# EAGLE board Alfa_t (EAGLE 9.6.2)
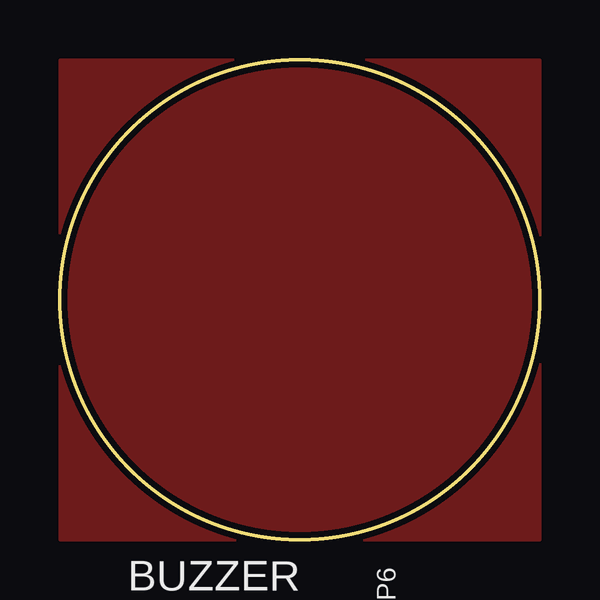
[diagram p0: board, top side]
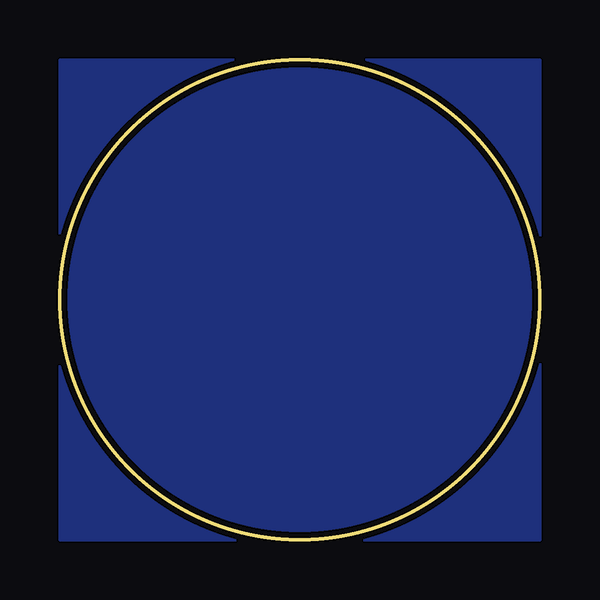
[diagram p1: board, bottom side, seen from below]

Size 20 x 20 mm. Coordinates in mm from the lower left corner, seen from the top.
Outline: circle at 10,10 radius 10
Copper layers (1*16): Top 0.035mm / dielectric 1.5mm / Bottom 0.035mm
Design rules "rezonit": minimum track width 0.25mm, minimum drill 0.35mm, track to track 0.2mm, track to pad 0.2mm, pad to pad 0.15mm, via to via 0.2mm, smd to smd 0.2mm, copper to edge 0.25mm, drill to drill 0.25mm, minimum pad ring 10mil, minimum via ring 8mil, stop-mask expansion 4mil, vias tented up to drill 0mil, thermal gap 10mil

## Footprints (pad centres in the part's own frame; a part is rotated, then mirrored left to right if it is on the bottom)
SOT23-3 = smd 0.56 x 0.73: 1 -0.95,-1; 2 0.95,-1; 3 0,1
BUZZER = drill 0.9 octagon: + 0,-4; - 0,4
C1206 = smd 1.6 x 1.8: 1 -1.4,0; 2 1.4,0
C0603 = smd 1.1 x 1: 1 -0.85,0; 2 0.85,0
SMD1,27-2,54 = smd 1.27 x 2.54: 1 0,0
1X01 = drill 1.016 octagon: 1 0,0
SOP8 = smd 0.6 x 1.6: 1 -1.905,-2.6; 2 -0.635,-2.6; 3 0.635,-2.6; 4 1.905,-2.6; 5 1.905,2.6; 6 0.635,2.6; 7 -0.635,2.6; 8 -1.905,2.6
CHIPLED_0603 = smd 0.8 x 0.8: A 0,-0.75; C 0,0.75
SJ_2W = smd 1.27 x 2.54: 1 -2.54,0; 2 0,0; 3 2.54,0
R0603 = smd 1 x 1.1: 1 -0.85,0; 2 0.85,0
SJ = smd 1.168 x 1.6: 1 -0.762,0; 2 0.762,0
TSSOP-20 = smd 0.4 x 1.35: 1 -2.925,-2.875; 2 -2.275,-2.875; 3 -1.625,-2.875; 4 -0.975,-2.875; 5 -0.325,-2.875; 6 0.325,-2.875; 7 0.975,-2.875; 8 1.625,-2.875; 9 2.275,-2.875; 10 2.925,-2.875; 11 2.925,2.875; 12 2.275,2.875; 13 1.625,2.875; 14 0.975,2.875; 15 0.325,2.875; 16 -0.325,2.875; 17 -0.975,2.875; 18 -1.625,2.875; 19 -2.275,2.875; 20 -2.925,2.875

## Placement (x,y rotation side)
BUZ  SI2302CDS  [SOT23-3]  4,-35 0 top  (outside the outline)
BUZZER  BUZZER-5V  [BUZZER]  6,-9 0 top  (outside the outline)
C3  10µF  [C1206]  3,-19 0 top  (outside the outline)
C4  100nF  [C0603]  2,-25 0 top  (outside the outline)
GND  [SMD1,27-2,54]  25,-18 0 top  (outside the outline)
JP1  [1X01]  20,-19 0 top  (outside the outline)
MX25L512  MX25L25645  [SOP8]  27,-7 0 top  (outside the outline)
PA4  [CHIPLED_0603]  12,-36 0 top  (outside the outline)
PROG  [SJ_2W]  11,-19 0 top  (outside the outline)
PWR  [CHIPLED_0603]  17,-19 0 top  (outside the outline)
R1  1k  [R0603]  12,-30 0 top  (outside the outline)
R2  5k1  [R0603]  19,-25 0 top  (outside the outline)
R3  1k  [R0603]  16,-30 0 top  (outside the outline)
R4  5k1  [R0603]  24,-25 0 top  (outside the outline)
R5  5k1  [R0603]  2,-30 0 top  (outside the outline)
R6  5k1  [R0603]  7,-30 0 top  (outside the outline)
R17  5k1  [R0603]  9,-25 0 top  (outside the outline)
R18  1k  [R0603]  14,-25 0 top  (outside the outline)
RESET  [SJ]  16,-36 0 top  (outside the outline)
SCL  [SMD1,27-2,54]  8,-35 0 top  (outside the outline)
SDA  [SMD1,27-2,54]  25,-30 0 top  (outside the outline)
STM32F030F4P6  STM32F030F4P6  [TSSOP-20]  18,-8 0 top  (outside the outline)
VCC  [SMD1,27-2,54]  21,-30 0 top  (outside the outline)

## Library data of the parts
BUZ BUZZER = CanCubeSat
C3 C4 = rcl; SPICEPREFIX: C
GND SCL SDA VCC = wirepad
JP1 = pinhead
MX25L512 STM32F030F4P6 = HM
PA4 PWR = led
PROG RESET = jumper
R1-R6 R17 R18 = rcl; SPICEPREFIX: R

## Nets
BUZZER: R18.2 STM32F030F4P6.9
CS: MX25L512.1 STM32F030F4P6.14
GND: BUZ.2 C3.1 C4.1 GND.1 MX25L512.4 PROG.3 PWR.C R17.2 RESET.1 STM32F030F4P6.1 STM32F030F4P6.15
MISO: MX25L512.2 STM32F030F4P6.12
MOSI: R4.2 STM32F030F4P6.13
N$1: BUZ.3 BUZZER.-
N$2: PROG.2 STM32F030F4P6.20
N$3: PROG.1 STM32F030F4P6.19
N$4: PWR.A R3.2
N$5: PA4.A R1.2
N$6: PA4.C STM32F030F4P6.10
N$7: JP1.1 STM32F030F4P6.8
N$8: MX25L512.3 R5.1
N$9: BUZ.1 R17.1 R18.1
N$10: MX25L512.5 R4.1
N$11: MX25L512.7 R6.1
RESET: C4.2 R2.2 RESET.2 STM32F030F4P6.4
SCK: MX25L512.6 STM32F030F4P6.11
SCL: SCL.1 STM32F030F4P6.17
SDA: SDA.1 STM32F030F4P6.18
VCC: BUZZER.+ C3.2 MX25L512.8 R1.1 R2.1 R3.1 R5.2 R6.2 STM32F030F4P6.5 STM32F030F4P6.16 VCC.1

## Tracks (layer width: path | path; a pad name or v marks a point on that pad's centre or on a via)
BUZZER  (1 unrouted)
CS  (1 unrouted)
GND  (10 unrouted)
  pour Top: 0,0 0,20 20,20 20,0
  pour Bottom: 20,0 20,20 0,20 0,0
MISO  (1 unrouted)
MOSI  (1 unrouted)
N$1  (1 unrouted)
N$2  (1 unrouted)
N$3  (1 unrouted)
N$4  (1 unrouted)
N$5  (1 unrouted)
N$6  (1 unrouted)
N$7  (1 unrouted)
N$8  (1 unrouted)
N$9  (2 unrouted)
N$10  (1 unrouted)
N$11  (1 unrouted)
RESET  (3 unrouted)
SCK  (1 unrouted)
SCL  (1 unrouted)
SDA  (1 unrouted)
VCC  (10 unrouted)